# Altium PCB PCB.PcbDoc
Units mm, origin at the board's own origin, x right, y up, seen from the top; angles counter-clockwise.
Board outline 100.75 x 57.25 mm, 2 copper layers (Top Layer, Bottom Layer); 23 components, 59 nets, 184 pads, 282 vias.
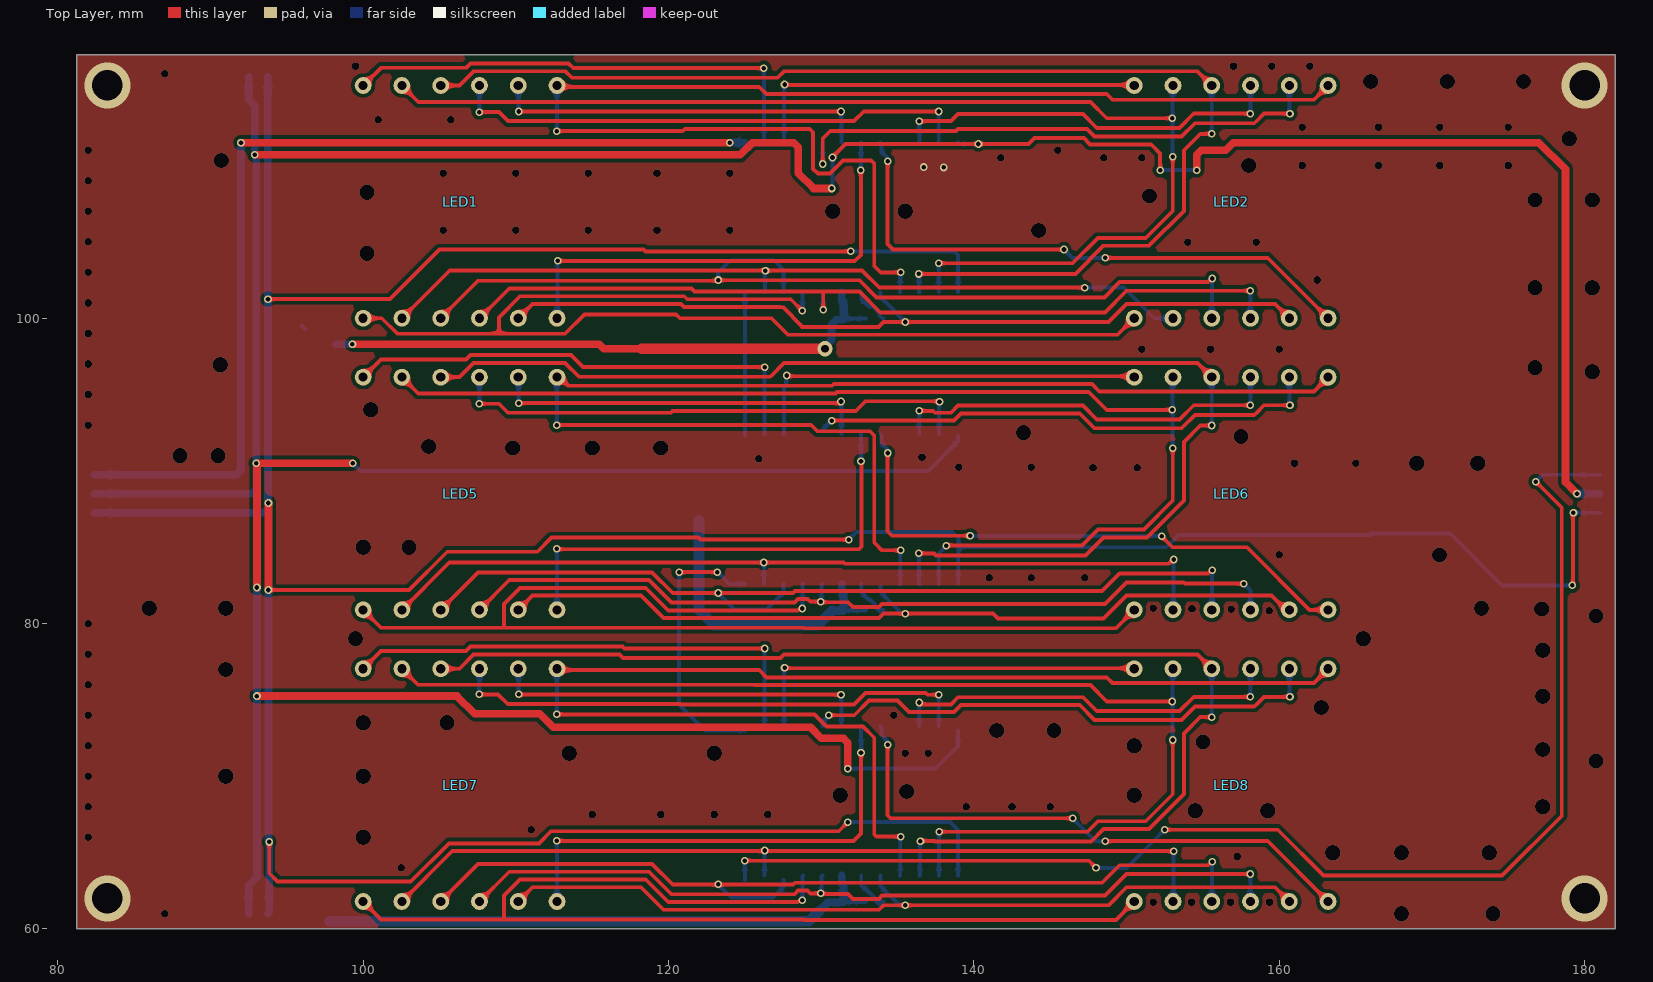
[diagram p0: Top Layer view]
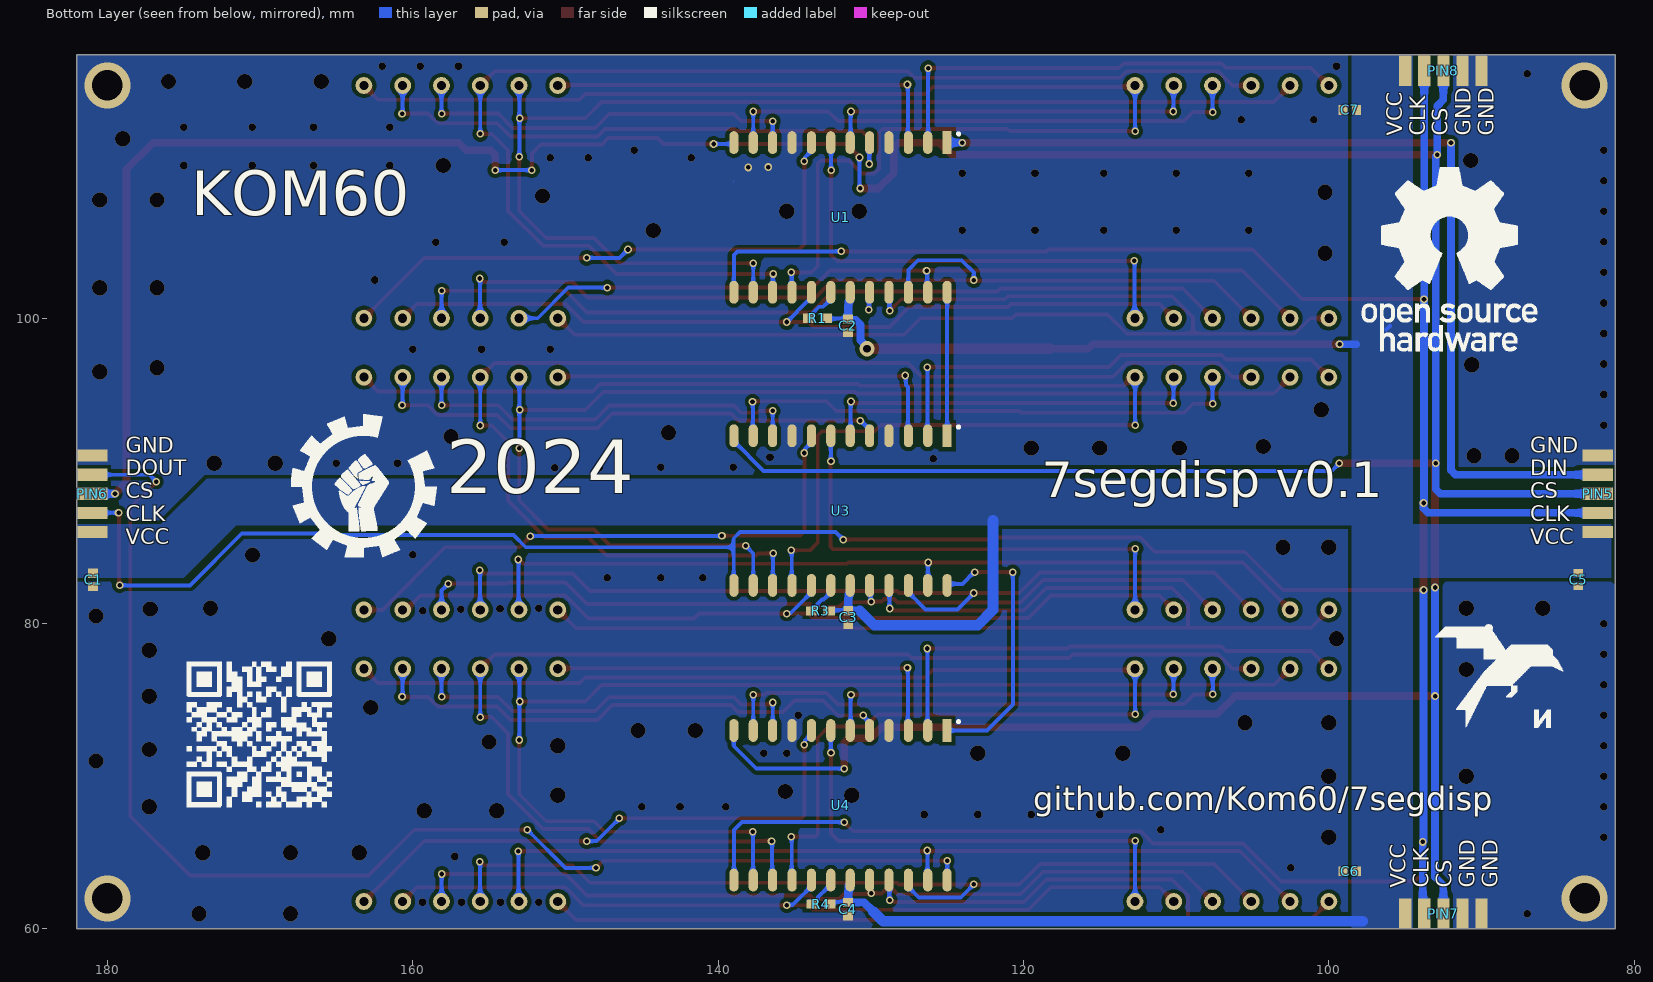
[diagram p1: Bottom Layer view, seen from below]

## Layer stack, top to bottom
Top Solder: solder mask 0.0102, Solder Resist, Dk 3.5
Top Layer: signal copper 0.0356
Dielectric 1: dielectric 0.32, FR-4, Dk 4.8
Bottom Layer: signal copper 0.0356
Bottom Solder: solder mask 0.0102, Solder Resist, Dk 3.5

## Board outline
81.25,60 81.25,117.25 182,117.25 182,60

## Design rules (kind name [scope] priority, off if disabled: settings)
Clearance [All] p1: gap=0.254 ignorepadtopadclearanceinfootprint=FALSE
ComponentClearance [All vs InComponent('No Component')] p1: gap=0.01 collisioncheckmode=3 verticalgap=0 showdistances=TRUE donotcheckwithout3dbody=TRUE checkcomponentboundary=TRUE
FabricationTestpoint [All] p1: side=3 testpointundercomponent=TRUE minsize=0.2 maxsize=1 preferedsize=0.3 minholesize=0 maxholesize=1.016 preferedholesize=0.813 testpointgrid=0.025 allowsidetop=TRUE allowsidebottom=TRUE usegrid=TRUE gridtolerance=0
PolygonConnect [All] p1: connectstyle=Direct reliefconductorwidth=0.254 reliefentries=4 polygonreliefangle="90 Angle" airgapwidth=0.254
RoutingVias [All] p1: holewidth=0.711 width=1.27 viastyle="Through Hole" minholewidth=0.711 minwidth=1.27 maxholewidth=0.711 maxwidth=1.27
SolderMaskExpansion [All] p1: expansion=0.102 istentingtop=FALSE
Width [All] p1: maxlimit=3 minlimit=0.127 preferedwidth=0.254 minimp=50.000000 maximp=50.000000 favimp=50.000000
28 further rules are at their usual default settings.

## Classes and differential pairs
component class Shematic: C1 C2 C3 C5 C6 C7 LED1 LED2 LED5 LED6 LED7 LED8 PIN5 PIN6 PIN7 PIN8 R3 R4 U1 U3 U4

## Components (designator, comment, footprint, x,y, rotation, side; value= is the part's Value field where it differs from the comment)
C1 "22 µF" "CAP 0402_1005"#1 180.932,82.86 r90 bottom
C2 "10 µF" "CAP 0402_1005"#1 131.5,99.5 r90 bottom
C3 "10 µF" "CAP 0402_1005"#1 131.48,80.4 r90 bottom
C4 "10 µF" "CAP 0402_1005"#1 131.5,61.3 r90 bottom
C5 "22 µF" "CAP 0402_1005"#2 83.675,82.875 r90 bottom
C6 "22 µF" "CAP 0402_1005"#1 98.628,63.78 r180 bottom
C7 "22 µF" "CAP 0402_1005"#1 98.642,113.642 r180 bottom
LED1 "SR420561N" SR420561N 100,100 r0 top locked
LED2 "SR420561N" SR420561N 150.5,100 r0 top locked
LED5 "SR420561N" SR420561N 100,80.9 r0 top locked
LED6 "SR420561N" SR420561N 150.5,80.9 r0 top locked
LED7 "SR420561N" SR420561N 100,61.8 r0 top locked
LED8 "SR420561N" SR420561N 150.5,61.8 r0 top locked
PIN5 "5pin" PCBComponent_1 82.4,91 r180 bottom
PIN6 "5pin" PCBComponent_1 181,91 r180 bottom
PIN7 "5pin" PCBComponent_1 90,61 r270 bottom
PIN8 "5pin" PCBComponent_1 90,116.2 r270 bottom
R1 "10 kOhms" "RES 0402_1005" 133.5,100 r0 bottom
R3 "10 kOhms" "RES 0402_1005" 133.3,80.825 r0 bottom
R4 "10 kOhms" "RES 0402_1005" 133.275,61.625 r0 bottom
U1 "MAX7219" SO24 125,111.5 r270 bottom locked
U3 "MAX7219" SO24 125,92.3 r270 bottom locked
U4 "MAX7219" SO24 125,73 r270 bottom

## Footprints (in the part's own frame and the unit in brackets; to place one, negate y for a bottom-side part, rotate by r counter-clockwise, add the part's x,y. Pads: shape width x height; smd on the part's side, far side on the other; paste and mask are expansions set on the pad)
"CAP 0402_1005"#1 [mm] "Chip Capacitor, 2-Leads, Body 1.02x0.51mm, IPC Medium Density"
  rect 0.6x0.64 smd: 1(-0.44,0) 2(0.44,0)
  body extent -0.5,-0.26 0.5,0.26, height 0.52
"CAP 0402_1005"#2 [mm] "Chip Capacitor, 2-Leads, Body 1.02x0.51mm, IPC Medium Density"
  rect 0.5x0.64 smd: 1(-0.44,0) 2(0.44,0)
  body extent -0.5,-0.26 0.5,0.26, height 0.52
PCBComponent_1 [mm]
  rect 2x0.8 smd: 1(0,0) 2(0,-1.25) 3(0,-2.5) 4(0,-3.75) 5(0,-5)
"RES 0402_1005" [mm] "Chip Resistor, 2-Leads, Body 1.0x0.5mm, IPC Medium Density"
  rect 0.75x0.6 smd: 1(-0.575,0) 2(0.575,0)
  body extent -0.5,-0.25 0.5,0.25, height 0.35
SO24 [mm]
  rect 1.5x0.6 smd: 1(0,0)
  oval 1.5x0.6 smd: 2(0,-1.27) 3(0,-2.54) 4(0,-3.81) 5(0,-5.08) 6(0,-6.35) 7(0,-7.62) 8(0,-8.89) 9(0,-10.16) 10(0,-11.43) 11(0,-12.7) 12(0,-13.97) 13(9.8,-13.97) 14(9.8,-12.7) 15(9.8,-11.43) 16(9.8,-10.16) 17(9.8,-8.89) 18(9.8,-7.62) 19(9.8,-6.35) 20(9.8,-5.08) 21(9.8,-3.81) 22(9.8,-2.54) 23(9.8,-1.27) 24(9.8,0)
  silkscreen extent -0.61,0.71 -0.54,0.79, body extent -0.27,-14.67 10.07,0.72, height 2.56
SR420561N [mm]
  round 1.1 hole 0.6: 1(0,0) 2(2.54,0) 3(5.08,0) 4(7.62,0) 5(10.16,0) 6(12.7,0) 7(12.7,15.24) 8(10.16,15.24) 9(7.62,15.24) 10(5.08,15.24) 11(2.54,15.24) 12(0,15.24)
  body extent -18.9,-1.9 31.5,17.1, height 9

## Part data
C1 C5 C6 C7: library part CL05A226MQ6ZUN8, "CAP CER 22UF 6.3V X5R 0402", Device Package="0402 (1005 Metric)", Manufacturer="Samsung Electro-Mechanics", Operating Temperature="-55°C ~ 85°C", Supplier Part Number 1=1276-6804-1-ND, Temperature Coefficient=X5R, Tolerance=±20%, Voltage - Rated=6.3V, Applications="Boardflex Sensitive", Capacitance="22 µF", ComponentLink1Description=Datasheet, ComponentLink1URL=http://www.samsungsem.com/kr/support/library/product-catalog/mlcc.jsp, ComponentLink2Description="DigiKey Link", ComponentLink2URL=https://www.digikey.com/en/products/detail/samsung-electro-mechanics/CL05A226MQ6ZUN8/5961288, Features="Soft Termination", LastUpdated="07.08.2023 19:04:38", Lifecycle Status=Active, Minimum Order=1, Mounting Type="Surface Mount, MLCC", Package / Case="0402 (1005 Metric)", Packaging=TapeAndReel, Part Number=CL05A226MQ6ZUN8, Part Status=Active, PartId=5105, Price=0.35, Series=CL, Size / Dimension="0.039\" L x 0.020\" W (1.00mm x 0.50mm)", Supplier 1=DigiKey, Thickness (Max)="0.031\" (0.80mm)"
C2 C3 C4: library part CL05A106MQ5NUNC, "CAP CER 10UF 6.3V X5R 0402", Device Package="0402 (1005 Metric)", Manufacturer="Samsung Electro-Mechanics", Operating Temperature="-55°C ~ 85°C", Supplier Part Number 1=1276-1451-1-ND, Temperature Coefficient=X5R, Tolerance=±20%, Voltage - Rated=6.3V, Applications="General Purpose", Capacitance="10 µF", ComponentLink1Description=Datasheet, ComponentLink1URL=http://www.samsungsem.com/kr/support/product-search/mlcc/CL05A106MQ5NUNC.jsp, ComponentLink2Description="DigiKey Link", ComponentLink2URL=https://www.digikey.com/en/products/detail/samsung-electro-mechanics/CL05A106MQ5NUNC/3887109, LastUpdated="03.01.2023 20:04:20", Lifecycle Status=Active, Minimum Order=1, Mounting Type="Surface Mount, MLCC", Package / Case="0402 (1005 Metric)", Packaging=TapeAndReel, Part Number=CL05A106MQ5NUNC, Part Status=Active, PartId=1766, Price=0.03, Series=CL, Size / Dimension="0.039\" L x 0.020\" W (1.00mm x 0.50mm)", Supplier 1=DigiKey, Thickness (Max)="0.028\" (0.70mm)"
PIN5 PIN6 PIN7 PIN8: library part 5_pin
R1 R3 R4: library part RC0402JR-0710KP, "RES SMD 10K OHM 5% 1/16W 0402", Device Package="0402 (1005 Metric)", Manufacturer=Yageo, Operating Temperature="-55°C ~ 155°C", Power (Watts)="0.063W, 1/16W", Supplier Device Package=0402, Supplier Part Number 1=YAG1281CT-ND, Temperature Coefficient=±150ppm/°C, Tolerance=±5%, ComponentLink1Description=Datasheet, ComponentLink1URL=http://www.yageo.com/NewPortal/yageodocoutput?fileName=/pdf/R-Chip/PYu-RC_51_RoHS_P_0.pdf, ComponentLink2Description="DigiKey Link", ComponentLink2URL=https://www.digikey.com/en/products/detail/yageo/RC0402JR-0710KP/4935296, Composition="Thick Film", Features="Moisture Resistant", Height - Seated (Max)="0.016\" (0.40mm)", LastUpdated="02.01.2023 20:21:12", Lifecycle Status=Active, Minimum Order=1, Number of Terminations=2, Package / Case="0402 (1005 Metric)", Packaging=CutTape, Part Number=RC0402JR-0710KP, Part Status=Active, PartId=11464, Price=0.01, Resistance="10 kOhms", Series="RC-P Lead Free", Size / Dimension="0.039\" L x 0.020\" W (1.00mm x 0.50mm)", Supplier 1=DigiKey
U1 U3 U4: library part MAX7219EWG

## Via types
v1: diameter 0.5, hole 0.3, Top Layer to Bottom Layer, tented both sides, 122 vias
v2: diameter 0.5, hole 0.5, Top Layer to Bottom Layer, tented both sides, 87 vias
v3: diameter 1, hole 1, Top Layer to Bottom Layer, tented both sides, 68 vias
v4: diameter 3, hole 2, Top Layer to Bottom Layer, 4 vias
v5: diameter 1, hole 0.5, Top Layer to Bottom Layer, tented both sides, 1 vias

## Nets (pads, with @x,y where several pads share a name; then routed paths per layer and width w, separated by ;. In a path a pad name is that pad's centre, name@x,y a point inside that pad or via, vN(x,y) a via of type N, cw(c..) or ccw(c..) an arc to the next point about the centre after c; other vN are vias at no path point)
CLK: PIN5.4 PIN6.4 PIN7.4 PIN8.4 U1.13 U3.13 U4.13 | length 266.6
  Top Layer w0.254: v1(93.769,101.254) 101.754,101.254 105,104.5 118.377,104.5 118.496,104.381 v1(131.94,104.381) ; v1(93.8,82.2) 103,82.2 105.508,84.708 111.408,84.708 112.331,85.631 121.967,85.631 122.098,85.5 v1(131.8,85.5) ; v1(93.854,65.7) 93.854,63.646 94.4,63.1 103.122,63.1 105.63,65.608 111.508,65.608 112.3,66.4 131.15,66.4 v1(131.75,67) ; v1(179.2,82.5) 179.234,82.534 179.234,87.224 v1(179.267,87.258)
  Top Layer w0.5: v1(93.8,82.2) v1(93.8,87.9)
  Bottom Layer w0.254: v1(131.75,67) 138.437,67 138.964,66.474 U4.13@138.964,63.494 ; v1(131.8,85.5) 132.3,86 138.562,86 138.976,85.586 138.976,85 ; v1(131.94,104.381) 138.74,104.381 138.97,104.151 U1.13 ; U3.13@138.976,82.606 138.976,85 ; v1(179.2,82.5) 174.6,82.5 171.2,85.9 166.05,85.9 165.95,85.8 153.4,85.8 152.6,85 138.976,85 ; v1(179.267,87.258) 180.992,87.258 PIN6.4
  Bottom Layer w0.5: PIN5.4 93.507,87.25 93.8,87.543 v1(93.8,87.9) 93.769,87.931 v1(93.769,101.254) ; PIN7.4 93.854,61.104 v1(93.854,65.7) 93.8,65.754 v1(93.8,82.2) ; v1@93.75,101.254 PIN8.4@93.75,115.8
CS: PIN5.3 PIN6.3 PIN7.3 PIN8.3 U1.12 U3.12 U4.12 | length 284.5
  Top Layer w0.254: v1(130.74,110.525) 130.74,110.561 131.591,111.412 v1(140.3,111.412) 143.589,111.412 143.978,111.8 147.2,111.8 147.616,111.384 151.616,111.384 152.2,110.8 v1(152.2,109.7)
  Top Layer w0.5: v1(92.9,110.7) 124.7,110.7 125.5,111.5 128.207,111.5 128.5,111.207 128.5,109.5 129.5,108.5 v1(130.7,108.5) ; v1(93.046,75.254) 106.146,75.254 107.3,74.1 111.563,74.1 112.463,73.2 129.3,73.2 130,72.5 131.457,72.5 131.75,72.207 v1(131.75,70.5) ; v1(93.046,82.364) 93.046,90.446 v1(92.996,90.496) v1@99.31,90.496 ; v1(154.6,109.7) 154.6,110.7 154.9,111 156.5,111 157,111.5 177,111.5 178.75,109.75 178.75,89.25 v1(179.5,88.5)
  Bottom Layer w0.254: v1(99.31,90.501) 99.812,90 137.02,90 138.97,91.95 U3.12 ; v1(130.7,108.5) 130.744,108.544 130.744,110.522 v1(130.74,110.525) ; v1(131.75,70.5) 137.5,70.5 138.97,71.97 U4.12 ; U1.12 139.058,111.412 v1(140.3,111.412) ; v1(152.2,109.7) v1(154.6,109.7)
  Bottom Layer w0.5: PIN5.3 92.703,88.5 92.996,88.793 92.996,110.604 v1(92.9,110.7) 92.9,113.9 92.5,114.3 PIN8.3@92.5,115.8 ; PIN7.3 92.5,62.854 93.046,63.4 v1(93.046,75.254) v1(93.046,82.364) ; v1(179.5,88.5) PIN6.3
"DIG 1_1": LED1.12 U1.2 | length 31.9
  Top Layer w0.254: LED1.12 101.16,116.4 106.745,116.4 107.037,116.692 113.447,116.692 113.758,116.381 v1(126.25,116.381)
  Bottom Layer w0.254: v1(126.25,116.381) 126.25,111.52 U1.2
"DIG 1_2": LED5.12 U3.2 | length 31.6
  Top Layer w0.254: LED5.12 101.16,97.3 106.745,97.3 107.027,97.582 113.61,97.582 114.392,96.8 v1(126.3,96.8)
  Bottom Layer w0.254: U3.2@126.27,92.4 126.285,92.415 126.285,96.785 v1(126.3,96.8)
"DIG 1_3": LED7.12 U4.2 | length 32
  Top Layer w0.254: LED7.12 101.16,78.2 106.745,78.2 107.037,78.492 116.979,78.492 117.102,78.369 v1(126.3,78.369)
  Bottom Layer w0.254: U4.2@126.27,73.3 126.285,73.315 126.285,78.354 v1(126.3,78.369)
"DIG 2_1": LED1.9 U1.11 | length 34.4
  Top Layer w0.254: v1(107.6,113.5) 108.9,113.5 109.492,112.908 132.158,112.908 132.789,113.539 v1(137.7,113.539)
  Bottom Layer w0.254: v1(107.6,113.5) 107.62,113.52 LED1.9 ; U1.11 v1(137.7,113.539)
"DIG 2_2": LED5.9 U3.11 | length 34.6
  Top Layer w0.254: v1(107.6,94.4) 108.9,94.4 109.492,93.808 120.159,93.808 120.265,93.914 132.264,93.914 132.912,94.562 137.723,94.562 v1(137.749,94.536)
  Bottom Layer w0.254: v1(107.6,94.4) 107.62,94.42 LED5.9 ; U3.11@137.7,92.4 137.725,92.425 137.725,94.511 v1(137.749,94.536)
"DIG 2_3": LED7.9 U4.11 | length 34.5
  Top Layer w0.254: v1(107.6,75.362) 108.838,75.362 109.469,74.731 120.802,74.731 120.825,74.708 132.158,74.708 132.912,75.462 136.832,75.462 136.955,75.339 v1(137.7,75.339)
  Bottom Layer w0.254: v1(107.6,75.362) 107.6,76.052 107.62,76.072 LED7.9 ; U4.11@137.7,73.3 v1(137.7,75.339)
"DIG 3_1": LED1.8 U1.6 | length 24.9
  Top Layer w0.254: v1(110.2,113.539) v1(131.3,113.539)
  Bottom Layer w0.254: LED1.8 110.18,115.22 110.18,113.559 v1(110.2,113.539) ; v1(131.3,113.539) 131.325,113.514 131.325,111.525 U1.6
"DIG 3_2": LED5.8 U3.6 | length 25
  Top Layer w0.254: v1(110.2,94.439) 131.127,94.439 131.233,94.545 v1(131.3,94.545)
  Bottom Layer w0.254: LED5.8 110.18,96.12 110.18,94.459 v1(110.2,94.439) ; v1(131.3,94.545) 131.325,94.52 131.325,92.425 U3.6@131.35,92.4
"DIG 3_3": LED7.8 U4.6 | length 24.9
  Top Layer w0.254: v1(110.2,75.362) 110.211,75.35 131.289,75.35 v1(131.3,75.339)
  Bottom Layer w0.254: LED7.8 110.18,77.02 110.18,75.382 v1(110.2,75.362) ; v1(131.3,75.339) 131.325,75.314 131.325,73.325 U4.6@131.35,73.3
"DIG 4_1": LED1.6 U1.7 | length 31.2
  Top Layer w0.254: v1(112.75,103.762) 112.762,103.75 132.201,103.75 132.6,104.149 132.6,106.917 v1(132.6,109.7)
  Bottom Layer w0.254: LED1.6 112.725,100.025 112.725,103.737 v1(112.75,103.762) ; v1(132.6,109.7) 132.61,109.71 132.61,111.49 U1.7
"DIG 4_2": LED5.6 U3.7 | length 31.4
  Top Layer w0.254: v1(112.675,84.9) 112.706,84.869 132.469,84.869 132.65,85.05 132.65,90.376 132.647,90.379 132.647,90.594 v1(132.61,90.631)
  Bottom Layer w0.254: v1(112.675,84.9) 112.688,84.887 112.688,80.913 LED5.6 ; v1(132.61,90.631) 132.615,90.636 132.615,92.385 U3.7@132.61,92.39
"DIG 4_3": LED7.6 U4.7 | length 31.2
  Top Layer w0.254: v1(112.675,65.769) 132.119,65.769 132.61,66.26 v1(132.61,71.531)
  Bottom Layer w0.254: v1(112.675,65.769) 112.688,65.756 112.688,61.813 LED7.6 ; v1(132.61,71.531) 132.615,71.536 132.615,73.285 U4.7@132.61,73.29
"DIG 5_1": LED2.12 U1.3 | length 26.8
  Top Layer w0.254: v1(127.6,115.309) 127.634,115.274 150.466,115.274 LED2.12
  Bottom Layer w0.254: U1.3 127.57,111.53 127.57,115.279 v1(127.6,115.309)
"DIG 5_2": LED6.12 U3.3 | length 26.7
  Top Layer w0.254: v1(127.75,96.25) 127.797,96.203 150.437,96.203 LED6.12
  Bottom Layer w0.254: U3.3@127.54,92.4 127.57,92.43 127.57,95.492 127.703,95.625 127.703,96.203 v1(127.75,96.25)
"DIG 5_3": LED8.12 U4.3 | length 26.8
  Top Layer w0.254: v1(127.6,77.109) 127.634,77.074 150.466,77.074 LED8.12
  Bottom Layer w0.254: U4.3@127.54,73.3 127.57,73.33 127.57,77.079 v1(127.6,77.109)
"dig 6_1": LED2.9 U1.10 | length 25.9
  Top Layer w0.254: v1(136.431,112.893) 136.445,112.908 138.49,112.908 138.958,113.376 147.142,113.376 148.049,112.469 153.469,112.469 154.4,113.4 v1(158.1,113.4)
  Bottom Layer w0.254: U1.10 v1(136.431,112.893) ; v1(158.1,113.4) 158.12,113.42 LED2.9
"dig 6_2": LED6.9 U3.10 | length 26.1
  Top Layer w0.254: v1(136.415,93.931) 137.316,93.931 137.439,93.808 138.49,93.808 138.958,94.276 147.142,94.276 148.049,93.369 153.469,93.369 154.4,94.3 v1(158.1,94.3)
  Bottom Layer w0.254: v1(136.415,93.931) 136.422,93.924 136.422,92.408 U3.10@136.43,92.4 ; v1(158.1,94.3) 158.12,94.32 LED6.9
"dig 6_3": LED8.9 U4.10 | length 25.8
  Top Layer w0.254: v1@136.6,74.708 138.49,74.708 138.958,75.176 147.142,75.176 148.049,74.269 153.469,74.269 154.4,75.2 v1(158.1,75.2)
  Bottom Layer w0.254: v1(136.415,74.831) 136.422,74.824 136.422,73.308 U4.10@136.43,73.3 ; v1(158.1,75.2) 158.12,75.22 LED8.9
"dig 7_1": LED2.8 U1.5 | length 36.6
  Top Layer w0.254: v1(130.1,110.1) 130.1,111.77 130.592,112.262 138.834,112.262 138.953,112.381 147.419,112.381 147.908,111.892 153.61,111.892 154.487,112.769 158.361,112.769 158.492,112.9 158.5,112.9 159,113.4 v1(160.7,113.4)
  Bottom Layer w0.254: U1.5 130.09,111.49 130.09,110.11 v1(130.1,110.1) ; LED2.8 160.66,113.44 v1(160.7,113.4)
"dig 7_2": LED6.8 U3.5 | length 34
  Top Layer w0.254: v1(130.689,93.283) 130.706,93.3 138.7,93.3 139.168,93.768 146.932,93.768 147.908,92.792 153.61,92.792 154.487,93.669 158.361,93.669 158.492,93.8 158.5,93.8 159,94.3 v1(160.7,94.3)
  Bottom Layer w0.254: U3.5@130.08,92.68 130.08,92.712 130.651,93.283 v1(130.689,93.283) ; LED6.8 160.66,94.34 v1(160.7,94.3)
"dig 7_3": LED8.8 U4.5 | length 34.9
  Top Layer w0.254: v1(130.5,74) 132.168,74 133.122,74.954 135,74.954 135.754,74.2 138.7,74.2 139.168,74.668 146.932,74.668 147.908,73.692 153.61,73.692 154.487,74.569 158.361,74.569 158.492,74.7 158.5,74.7 159,75.2 v1(160.7,75.2)
  Bottom Layer w0.254: U4.5@130.09,73.29 130.09,73.525 130.5,73.935 v1(130.5,74) ; LED8.8 160.66,75.24 v1(160.7,75.2)
"DIG 8_1": LED2.6 U1.8 | length 37.7
  Top Layer w0.254: v1(134.35,110.275) 134.35,104.85 134.7,104.5 v1(145.9,104.5) ; v1(148.6,103.95) 159.25,103.95 LED2.6
  Bottom Layer w0.254: U1.8 133.956,111.434 133.956,110.89 134.303,110.543 134.303,110.322 v1(134.35,110.275) ; v1(145.9,104.5) 146.45,103.95 v1(148.6,103.95)
"DIG 8_2": LED6.6 U3.8 | length 37.5
  Top Layer w0.254: v1(134.35,91.175) 134.35,86.05 134.65,85.75 v1(139.75,85.75) ; v1(152.313,85.729) 152.313,85.687 153,85 157.877,85 161.977,80.9 LED6.6
  Bottom Layer w0.254: U3.8@133.89,92.4 133.956,92.334 133.956,91.79 134.303,91.443 134.303,91.222 v1(134.35,91.175) ; v1(139.75,85.75) 139.761,85.739 152.302,85.739 v1(152.313,85.729)
"DIG 8_3": LED8.6 U4.8 | length 37.2
  Top Layer w0.254: v1(134.35,72.075) 134.35,67.45 134.55,67.25 v1(146.475,67.25) ; v1(148.6,65.75) 159.25,65.75 LED8.6
  Bottom Layer w0.254: U4.8@133.89,73.3 133.956,73.234 133.956,72.69 134.303,72.343 134.303,72.122 v1(134.35,72.075) ; v1(146.475,67.25) 146.475,67.225 147.95,65.75 v1(148.6,65.75)
DIN_1: PIN5.2 U1.1 | length 64.2
  Top Layer w0.5: v1(92,111.5) 121.3,111.5 v1(124,111.5)
  Bottom Layer w0.5: PIN5.2 91.707,89.75 92,90.043 v1(92,111.5) ; v1(124,111.5) U1.1
DOUT_1: U1.24 U3.1 | length 9.4
  Bottom Layer w0.254: U3.1 U1.24
DOUT_2: U3.24 U4.1 | length 18.3
  Top Layer w0.254: v1(120.7,83.369) v1(123.2,83.369)
  Bottom Layer w0.254: v1(120.7,83.369) 120.7,74.7 122.4,73 U4.1 ; v1(123.2,83.369) 123.231,83.369 124,82.6 U3.24@125,82.6
DOUT_3: PIN6.2 U4.24 | length 85.9
  Top Layer w0.254: v1@124.933,64.469 147.531,64.469 v1(148,64) ; v1(152.5,66.5) 159.9,66.5 162.9,63.5 174.6,63.5 178.5,67.4 178.5,87.597 v1(176.799,89.298)
  Bottom Layer w0.254: U4.24 v1(125,64.469) ; v1(148,64) 150,64 v1(152.5,66.5) ; v1(176.799,89.298) 177.25,89.75 PIN6.2
GND: C1.1 C2.1 C3.1 C4.1 C5.1 C6.1 C7.1 PIN5.1 PIN6.1 PIN7.1 PIN7.2 PIN8.1 PIN8.2 U1.4 U1.9 U3.4 U3.9 U4.4 U4.9
  other v1: 138.025,109.875 136.725,109.9
  other v2: 87,61 151.75,61.75 154.25,61.75 156.811,61.75 159.365,61.75 102.5,64 157.25,64.75 82,66 111,66.5 115,67.5 119.5,67.5 123,67.5 126.5,67.5 82,68 139.5,68 142.5,68 145,68 82,70 135.5,71.5 137,71.5 82,72 82,74 134.75,74 82,76 82,78 82,80 159.343,80.844 156.848,80.945 154.281,80.973 151.753,81.014 141,83 143.75,83 147.25,83 160,84.5 147.8,90.2 150.7,90.2 139,90.25 143.75,90.25 161,90.5 165,90.5 125.9,90.8 136.6,90.9 82,93 82,95 82,97 151,97.978 155.5,97.978 160,97.978 82,99 82,101 162.5,102.5 82,103 154,104.978 158.5,104.978 82,105 105.25,105.75 110,105.75 114.75,105.75 119.25,105.75 124,105.75 82,107 82,109 105.25,109.5 110,109.5 114.75,109.5 119.25,109.5 124,109.5 161.5,110 166.5,110 170.5,110 175,110 141.75,110.5 148.5,110.5 151,110.5 82,111 145.5,111 161.5,112.5 166.5,112.5 170.5,112.5 175,112.5 101,113 105.75,113 87,116 99.502,116.512 157.002,116.512 159.502,116.512 162.002,116.512
  other v3: 168,61 174,61 163.5,65 168,65 173.75,65 100,66 154.5,67.75 159.25,67.75 177.25,68 131.25,68.75 150.5,68.75 135.6,69 91,70 100,70 180.75,71 113.5,71.5 123,71.5 177.25,71.75 150.5,72 155,72.25 141.5,73 145.25,73 100,73.5 105.5,73.5 162.75,74.5 177.25,75.25 91,77 177.25,78.25 99.5,79 165.5,79 180.75,80.5 177.2,80.95 86,81 91,81 173.25,81 170.5,84.5 100,85 103,85 169,90.5 173,90.5 88,91 90.5,91 109.8,91.5 115,91.5 119.5,91.5 104.3,91.6 157.5,92.25 143.25,92.5 100.5,94 180.5,96.5 176.75,96.75 90.65,96.95 176.75,102 180.5,102 100.25,104.25 144.25,105.75 130.75,107 135.5,107 176.75,107.75 180.5,107.75 151.5,108 100.25,108.25 158,110 90.7,110.325 179,111.75 166,115.5 171,115.5 176,115.5
  other v4: 83.25,62 180,62 83.25,115.25 180,115.25
ISET_1: R1.2 U1.18 | length 2.5
  Bottom Layer w0.254: U1.18 132.62,101.25 133.122,100.748 133.391,100.748 133.827,100.312 133.827,100.173 134,100 R1.2
ISET_2: R3.2 U3.18 | length 2.6
  Bottom Layer w0.254: U3.18@132.62,82.6 U3.18 132.62,82.05 133.102,81.568 133.195,81.568 133.481,81.283 133.481,81.144 133.8,80.825 R3.2 ; R3.2@133.875,80.9 R3.2@134.075,80.9
ISET_3: R4.2 U4.18 | length 2.7
  Bottom Layer w0.254: U4.18@132.62,63.5 U4.18 132.62,62.844 132.78,62.684 132.855,62.684 133.456,62.083 133.456,61.944 133.775,61.625 R4.2 ; R4.2@133.85,61.8 R4.2@134.075,61.8
"SEG A_1": LED1.11 LED2.11 U1.14 | length 78.2
  Top Layer w0.254: LED1.11 103.61,114.17 147.63,114.17 148.7,113.1 v1(153,113.1) ; v1(137.7,103.6) 146.467,103.6 148.125,105.258 151.258,105.258 153.025,107.025 v1(153.025,110.575)
  Bottom Layer w0.254: U1.14 v1(137.7,103.6) ; v1(153.025,110.575) 153.012,110.588 153.012,113.088 v1(153,113.1) 153.02,113.12 153.02,115.22 LED2.11
"SEG A_2": LED5.11 LED6.11 U3.14 | length 78.3
  Top Layer w0.254: LED5.11 103.61,95.07 130.933,95.07 131.039,95.176 147.524,95.176 148.7,94 v1(153,94) ; v1(138.2,85.1) 138.219,85.119 147.086,85.119 148.125,86.158 151.131,86.158 153.025,88.052 v1(153.025,91.475)
  Bottom Layer w0.254: U3.14@137.7,82.6 137.7,84.6 v1(138.2,85.1) ; v1(153.025,91.475) 153.012,91.488 153.012,93.988 v1(153,94) 153.02,94.02 153.02,96.12 LED6.11
"SEG A_3": LED7.11 LED8.11 U4.14 | length 78.8
  Top Layer w0.254: LED7.11 103.587,75.993 125.597,75.993 125.62,75.97 147.63,75.97 148.7,74.9 v1(153,74.9) ; v1(137.725,66.369) 147.436,66.369 148.125,67.058 151.258,67.058 153.025,68.825 v1(153.025,72.375)
  Bottom Layer w0.254: U4.14@137.7,63.5 137.712,63.513 137.712,66.357 v1(137.725,66.369) ; v1(153.025,72.375) 153.012,72.388 153.012,74.888 v1(153,74.9) 153.02,74.92 153.02,77.02 LED8.11
"seg B_1": LED1.7 LED2.7 U1.16 | length 88.1
  Top Layer w0.254: v1(112.688,112.254) 120.929,112.254 121.075,112.4 129.25,112.4 129.469,112.181 129.469,109.78 129.78,109.469 130.577,109.469 131.439,110.331 133.27,110.331 133.475,110.126 133.475,103.425 133.9,103 v1(135.2,103) ; LED1.7 112.785,115.155 125.945,115.155 126.422,114.678 148.702,114.678 149.071,114.309 162.269,114.309 LED2.7
  Bottom Layer w0.254: v1(112.688,112.254) 112.694,112.26 112.694,115.234 LED1.7 ; U1.16 135.18,101.72 135.18,102.98 v1(135.2,103)
"seg B_2": LED5.7 LED6.7 U3.16 | length 86.8
  Top Layer w0.254: v1(112.675,93) 129.35,93 129.75,92.6 133.2,92.6 133.475,92.325 133.475,85.299 133.974,84.8 v1(135.2,84.8) ; LED5.7 112.893,96.14 113.455,95.578 130.722,95.578 130.828,95.684 147.734,95.684 148.209,95.209 162.269,95.209 LED6.7
  Bottom Layer w0.254: v1(112.675,93) 112.688,93.013 112.688,96.128 LED5.7 ; U3.16@135.16,82.6 135.18,82.62 135.18,84.78 v1(135.2,84.8)
"seg B_3": LED7.7 LED8.7 U4.16 | length 86.4
  Top Layer w0.254: v1(112.675,74.054) 129.554,74.054 130.358,73.25 132.75,73.25 133.475,72.525 133.475,66.199 133.624,66.05 v1(135.2,66.05) ; LED7.7 112.785,76.955 125.945,76.955 126.422,76.478 148.702,76.478 149.071,76.109 162.269,76.109 LED8.7
  Bottom Layer w0.254: v1(112.675,74.054) 112.688,74.067 112.688,77.028 LED7.7 ; U4.16@135.16,63.5 135.18,63.52 135.18,66.03 v1(135.2,66.05)
"SEG C_1": LED1.4 LED2.4 U1.20 | length 56.7
  Top Layer w0.254: LED1.4 109.567,101.947 121.511,101.947 121.708,101.75 130,101.75 ; v1(130.136,100.564) 130.136,101.614 130,101.75 ; v1(158.1,101.8) 150,101.8 148.581,100.381 133.869,100.381 132.5,101.75 130,101.75
  Bottom Layer w0.254: U1.20 130.108,101.672 130.108,100.592 v1(130.136,100.564) ; v1(158.1,101.8) 158.11,101.79 158.11,100.01 LED2.4
"SEG C_2": LED5.4 LED6.4 U3.20 | length 55.6
  Top Layer w0.254: LED5.4 109.567,82.847 118.719,82.847 120.194,81.372 128.243,81.372 128.489,81.618 129.102,81.618 129.285,81.435 v1(129.965,81.435) ; v1@129.965,81.4 131.762,81.4 132.087,81.075 133.783,81.075 133.989,81.281 148.581,81.281 150,82.7 153.748,82.7 153.832,82.616 v1(157.677,82.616)
  Bottom Layer w0.254: v1(129.965,81.435) 129.965,81.502 130.014,81.551 130.014,82.534 U3.20@130.08,82.6 ; v1(157.677,82.616) 157.677,82.59 158.11,82.157 158.11,80.91 LED6.4
"SEG C_3": LED7.4 LED8.4 U4.20 | length 55.9
  Top Layer w0.254: LED7.4 109.567,63.747 118.719,63.747 120.194,62.272 128.243,62.272 128.489,62.518 129.102,62.518 129.285,62.335 v1(129.965,62.335) ; v1@129.965,62.3 131.762,62.3 132.087,61.975 133.783,61.975 133.989,62.181 148.581,62.181 150,63.6 v1(158.1,63.6)
  Bottom Layer w0.254: v1(129.965,62.335) 129.965,62.402 130.014,62.451 130.014,63.434 U4.20@130.08,63.5 ; v1(158.1,63.6) 158.11,63.59 158.11,61.81 LED8.4
"SEG D_1": LED1.2 LED2.2 U1.23 | length 54.5
  Top Layer w0.254: LED1.2 105.671,103.131 126.338,103.131 v1(126.35,103.119) 132.681,103.119 133.8,102 v1(147.25,102)
  Bottom Layer w0.254: U1.23 126.31,101.74 126.31,103.079 v1(126.35,103.119) ; v1(147.25,102) 149.817,102 151.817,100 LED2.2
"SEG D_2": LED5.2 LED6.2 U3.23 | length 56.7
  Top Layer w0.254: LED5.2 105.64,84 131.48,84 131.559,83.921 152.754,83.921 153.033,84.2 v1(153.1,84.2)
  Bottom Layer w0.254: v1(126.25,84) 126.26,83.99 126.26,82.61 U3.23@126.27,82.6 ; LED6.2 153.07,80.93 153.07,84.17 v1(153.1,84.2)
"SEG D_3": LED7.2 LED8.2 U4.23 | length 56.9
  Top Layer w0.254: LED7.2 105.84,65.1 126.262,65.1 v1(126.3,65.138) ; v1@126.3,65.1 v1(153.1,65.1)
  Bottom Layer w0.254: U4.23@126.27,63.5 126.285,63.515 126.285,65.123 v1(126.3,65.138) ; LED8.2 153.07,61.83 153.07,65.07 v1(153.1,65.1)
"SEG DP_1": LED1.3 LED2.3 U1.22 | length 62
  Top Layer w0.254: LED1.3 107.535,102.455 123.205,102.455 v1(123.25,102.5) 123.262,102.488 132.512,102.488 133.631,101.369 148.544,101.369 149.55,102.375 155.328,102.375 155.553,102.6 v1(155.6,102.6)
  Bottom Layer w0.254: v1(123.25,102.5) 123.25,103 124.05,103.8 126.9,103.8 127.54,103.16 U1.22 ; LED2.3 155.59,100.01 155.59,102.59 v1(155.6,102.6)
"SEG DP_2": LED5.3 LED6.3 U3.22 | length 61
  Top Layer w0.254: LED5.3 107.535,83.355 118.929,83.355 120.281,82.003 v1(123.25,82.003) ; v1@123.364,82.003 128.155,82.003 128.278,82.126 148.401,82.126 149.55,83.275 155.328,83.275 155.553,83.5 v1(155.6,83.5)
  Bottom Layer w0.254: v1(123.25,82.003) 124.328,80.925 126.415,80.925 127.54,82.05 U3.22 U3.22@127.54,82.6 ; LED6.3 155.59,80.91 155.59,83.49 v1(155.6,83.5)
"SEG DP_3": LED7.3 LED8.3 U4.22 | length 60.6
  Top Layer w0.254: LED7.3 107.535,64.255 118.929,64.255 120.281,62.903 123.24,62.903 v1(123.257,62.919) ; v1@123.364,62.903 128.155,62.903 128.278,63.026 148.401,63.026 149.55,64.175 155.328,64.175 155.553,64.4 v1(155.6,64.4)
  Bottom Layer w0.254: v1(123.257,62.919) 124.107,62.069 126.859,62.069 127.54,62.75 U4.22 ; LED8.3 155.59,61.81 155.59,64.39 v1(155.6,64.4)
"SEG E_1": LED1.1 LED2.1 U1.21 | length 75.6
  Top Layer w0.254: LED1.1 101.223,100 102.242,98.981 108.9,98.981 ; v1(128.75,100.5) 128.008,101.242 121.226,101.242 121.029,101.439 110.282,101.439 108.9,100.057 108.9,98.981 ; LED2.1 149.417,98.917 127.833,98.917 126.75,100 120.75,100 120.5,100.25 114.5,100.25 113.231,98.981 108.9,98.981
  Bottom Layer w0.254: v1(128.75,100.5) 128.78,100.53 128.78,101.67 U1.21
"SEG E_2": LED5.1 LED6.1 U3.21 | length 75.3
  Top Layer w0.254: LED5.1 101.175,79.725 109.229,79.725 128.871,79.725 128.899,79.697 149.297,79.697 LED6.1 ; 109.275,79.725 109.229,79.771 109.229,81.286 110.282,82.339 118.508,82.339 119.983,80.864 128.453,80.864 128.529,80.94 128.703,80.94 v1(128.75,80.987)
  Bottom Layer w0.254: v1(128.75,80.987) 128.78,81.017 128.78,82.57 U3.21@128.81,82.6
"SEG E_3": LED7.1 LED8.1 U4.21 | length 75.3
  Top Layer w0.254: LED7.1 101.175,60.625 109.229,60.625 128.871,60.625 128.899,60.597 149.297,60.597 LED8.1 ; 109.275,60.625 109.229,60.671 109.229,62.186 110.282,63.239 118.508,63.239 119.983,61.764 128.453,61.764 128.529,61.84 128.703,61.84 v1(128.75,61.887)
  Bottom Layer w0.254: v1(128.75,61.887) 128.78,61.917 128.78,63.47 U4.21@128.81,63.5
"SEG F_1": LED1.10 LED2.10 U1.15 | length 81.3
  Top Layer w0.254: LED1.10 106.303,115.24 107.234,116.171 113.25,116.171 113.671,115.75 127.149,115.75 127.57,116.171 154.649,116.171 LED2.10 ; v1(136.4,102.9) 146.65,102.9 148.5,104.75 151.468,104.75 153.75,107.032 153.75,111 154.825,112.075 v1(155.575,112.075)
  Bottom Layer w0.254: v1(136.4,102.9) 136.415,102.885 136.415,101.715 U1.15 ; v1(155.575,112.075) 155.58,112.08 LED2.10
"SEG F_2": LED5.10 LED6.10 U3.15 | length 82.2
  Top Layer w0.254: LED5.10 106.303,96.14 107.238,97.074 113.226,97.074 114.131,96.169 126.668,96.169 127.57,97.071 154.649,97.071 LED6.10 ; v1(136.4,84.6) 137.398,84.6 137.529,84.469 147.319,84.469 148.5,85.65 151.342,85.65 153.75,88.058 153.75,91.9 154.825,92.975 v1(155.575,92.975)
  Bottom Layer w0.254: v1(136.4,84.6) 136.415,84.585 136.415,82.615 U3.15@136.43,82.6 ; v1(155.575,92.975) 155.58,92.98 LED6.10
"SEG F_3": LED7.10 LED8.10 U4.15 | length 81.7
  Top Layer w0.254: LED7.10 106.303,77.04 107.234,77.971 116.781,77.971 117.014,77.738 127.337,77.738 127.57,77.971 154.649,77.971 LED8.10 ; v1@136.516,65.766 137.435,65.766 137.464,65.738 147.688,65.738 148.5,66.55 151.468,66.55 153.75,68.832 153.75,72.8 154.825,73.875 v1(155.575,73.875)
  Bottom Layer w0.254: U4.15@136.43,63.5 136.465,63.535 136.465,65.715 v1(136.5,65.75) ; v1(155.575,73.875) 155.58,73.88 LED8.10
"SEG G_1": LED1.5 LED2.5 U1.17 | length 55.2
  Top Layer w0.254: LED1.5 111.091,100.931 120.819,100.931 121.016,100.734 127.266,100.734 127.278,100.722 127.488,100.722 128.75,99.46 128.75,99.436 133.762,99.436 134.076,99.75 v1(135.5,99.75) 148.819,99.75 150,100.931 159.729,100.931 LED2.5
  Bottom Layer w0.254: U1.17 133.89,101.344 134.139,101.095 134.19,101.095 134.604,100.681 134.608,100.681 134.831,100.458 134.831,100.419 v1(135.5,99.75)
"SEG G_2": LED5.5 LED6.5 U3.17 | length 55.3
  Top Layer w0.254: LED5.5 111.091,81.831 118.2,81.831 119.675,80.356 133.782,80.356 134.076,80.65 v1(135.5,80.65) 141.243,80.65 141.568,80.325 148.494,80.325 150,81.831 159.501,81.831 160.432,80.9 LED6.5
  Bottom Layer w0.254: U3.17@133.89,82.422 133.89,82.05 135.243,80.697 135.453,80.697 v1(135.5,80.65)
"SEG G_3": LED7.5 LED8.5 U4.17 | length 55.3
  Top Layer w0.254: LED7.5 111.091,62.731 118.2,62.731 119.675,61.256 133.782,61.256 134.076,61.55 v1(135.5,61.55) 148.819,61.55 150,62.731 159.729,62.731 LED8.5
  Bottom Layer w0.254: U4.17@133.89,63.5 U4.17 133.89,62.799 135.092,61.597 135.453,61.597 v1(135.5,61.55)
VCC: C1.2 C2.2 C3.2 C4.2 C5.2 C6.2 C7.2 PIN5.5 PIN6.5 PIN7.5 PIN8.5 R1.1 R3.1 R4.1 U1.19 U3.19 U4.19 | length 95.3
  Top Layer w0.5: v1(99.3,98.3) 115.45,98.3 115.75,98 118.25,98
  Top Layer w0.7: 118.25,98 v5(130.25,98)
  Bottom Layer w0.254: 96,99.5 96.244,99.256 ; C4.2@131.51,61.77 132.895,61.77 R4.1@132.925,61.8 ; C3.2@131.51,80.87 132.895,80.87 R3.1@132.925,80.9 ; C2.2@131.51,99.97 132.895,99.97 R1.1
  Bottom Layer w0.5: 98.2,98.3 v1(99.3,98.3) ; 129.829,61.133 130.436,61.74 131.48,61.74 131.48,62.82 131.4,62.9 131.4,62.973 131.35,63.023 U4.19@131.35,63.5 ; v5(130.25,98) 130.25,98.135 130.676,98.561 130.676,99.569 130.997,99.89 131.45,99.89 C2.2 ; 130.72,80.84 C3.2 131.48,81.92 131.4,82 131.4,82.073 131.35,82.123 U3.19@131.35,82.6 ; U1.19 131.35,101.223 131.4,101.173 131.4,101.1 131.48,101.02 C2.2@131.48,99.94
  Bottom Layer w0.7: 97.8,60.5 129.196,60.5 129.829,61.133 ; 122,86.754 122,80.9 123,79.9 129.78,79.9 130.72,80.84

## Polygon pours and split planes (outlines as drawn)
GND on Bottom Layer "GND_L02_P012" (solid, remove dead copper, pour order 12): 81.25,117.25 81.25,60 182,60 182,117.25
VCC on Bottom Layer "VCC_L02_P008" (solid, pour order 8): 97.5,89.5 97.5,86.431 171.9,86.431 171.9,89.5
VCC on Bottom Layer "VCC_L02_P010" (solid, pour order 10): 182,86.5 176.5,86.5 173.5,89.5 171.8,89.5 171.272,86.728 175,83 182,83
VCC on Bottom Layer "VCC_L02_P005" (solid, pour order 5): 81.5,83 98,83 97.5,83.5 97.5,86.5 81.5,86.5
VCC on Bottom Layer "VCC_L02_P004" (solid, pour order 4): 94.5,117.25 94.5,60 98.5,60 98.5,117.25
no net on Top Solder (solid): 182,117.3 178,117.3 178,113.3 182,113.3
no net on Top Solder (solid): 182,59.9 182,63.9 178,63.9 178,59.9
no net on Top Solder (solid): 81.2,59.9 85.2,59.9 85.2,63.9 81.2,63.9
no net on Top Solder (solid): 81.1,117.3 81.1,113.3 85.1,113.3 85.1,117.3
no net on Bottom Solder (solid): 81.1,117.3 81.1,113.3 85.1,113.3 85.1,117.3
no net on Bottom Solder (solid): 81.2,59.9 85.2,59.9 85.2,63.9 81.2,63.9
no net on Bottom Solder (solid): 182,59.9 182,63.9 178,63.9 178,59.9
no net on Bottom Solder (solid): 182,117.3 178,117.3 178,113.3 182,113.3
GND on Top Layer "GND_L01_P013" (solid, remove dead copper, pour order 13): 81.25,117.25 81.25,60 182,60 182,117.25

## Silkscreen, mask and mechanical layers (free items; w line width, h text height)
Bottom Overlay:
  drawing of 91 lines, arcs and shapes, not listed
  text "GND" at 89.2,111.95 h1 r270
  text "GND" at 90.7,111.95 h1 r270
  text "CS" at 92.2,111.95 h1 r270
  text "CLK" at 93.7,111.95 h1 r270
  text "VCC" at 95.2,111.95 h1 r270
  text "KOM60" at 174.5,105.768 h5
  text "GND" at 86.8,91.2 h1
  text "GND" at 178.8,91.2 h1
  text "DIN" at 86.8,89.7 h1
  text "DOUT" at 178.8,89.7 h1
  text "CS" at 86.8,88.2 h1
  text "CS" at 178.8,88.2 h1
  text "7segdisp v0.1" at 118.796,87.485 h4
  text "2024" at 157.8,87.4 h6
  text "CLK" at 86.8,86.7 h1
  text "CLK" at 178.8,86.7 h1
  text "VCC" at 86.8,85.2 h1
  text "VCC" at 178.8,85.2 h1
  text "github.com/Kom60/7segdisp" at 119.346,67.762 h1.52
  text "GND" at 88.95,62.7 h1 r270
  text "GND" at 90.45,62.7 h1 r270
  text "CS" at 91.95,62.7 h1 r270
  text "CLK" at 93.45,62.7 h1 r270
  text "VCC" at 94.95,62.7 h1 r270
Bottom Solder:
  drawing of 5 lines, arcs and shapes, not listed
Mechanical 15:
  the board outline again, w0.1